# Altium PCB v0-9Bcpu.PcbDoc (part 1 of 2)
Units mil, origin at the board's own origin, x right, y up, seen from the top; angles counter-clockwise.
Board outline 3900 x 3900 mil, 2 copper layers (Top Layer, Bottom Layer); 133 components, 139 nets, 510 pads, 236 vias.
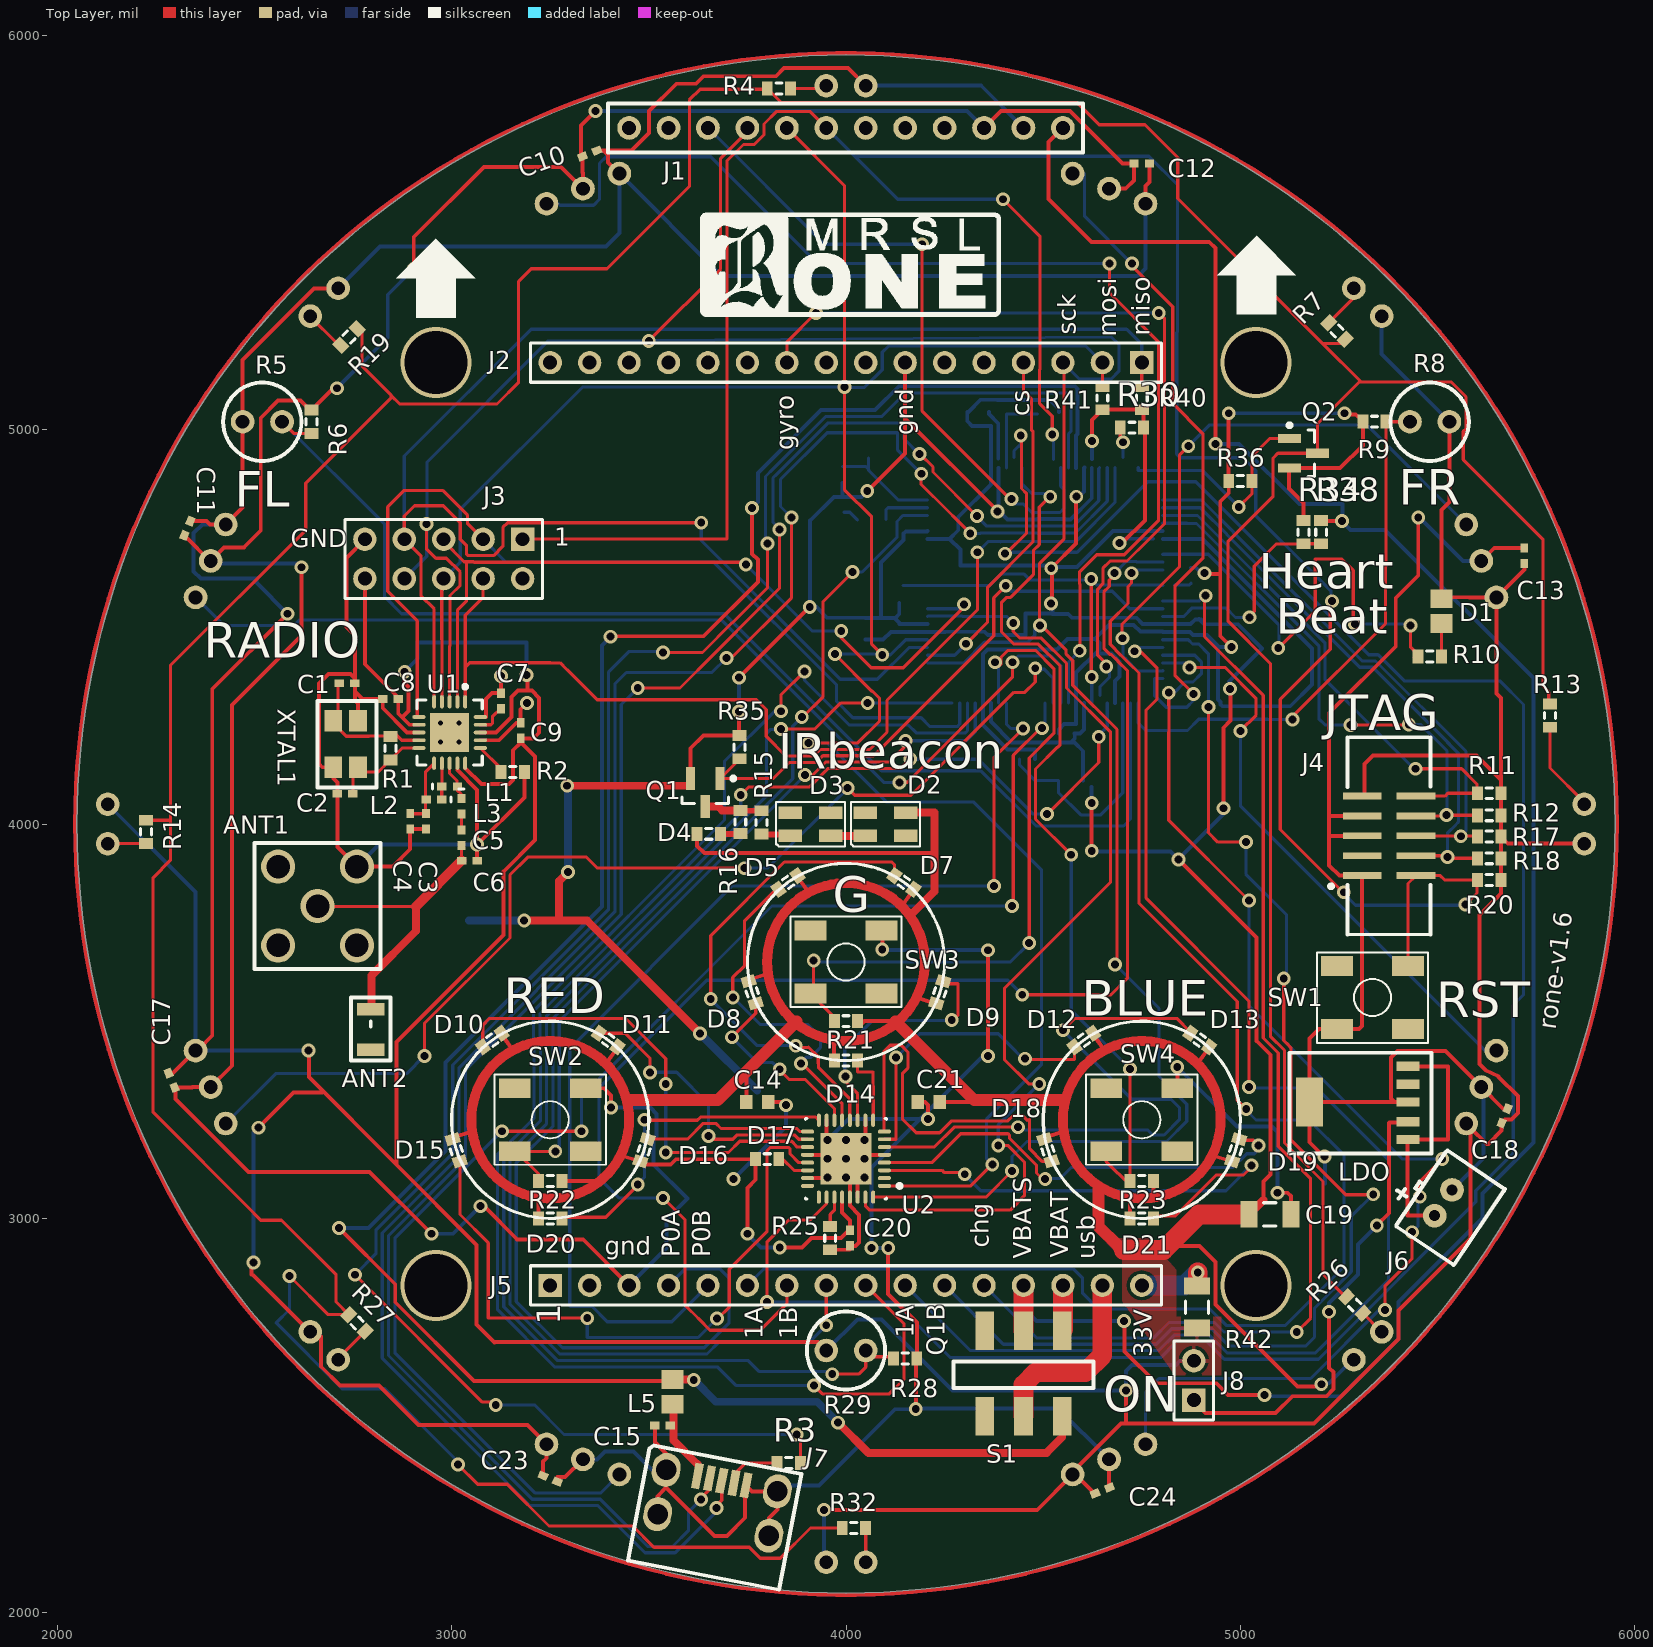
[diagram p0: Top Layer view]
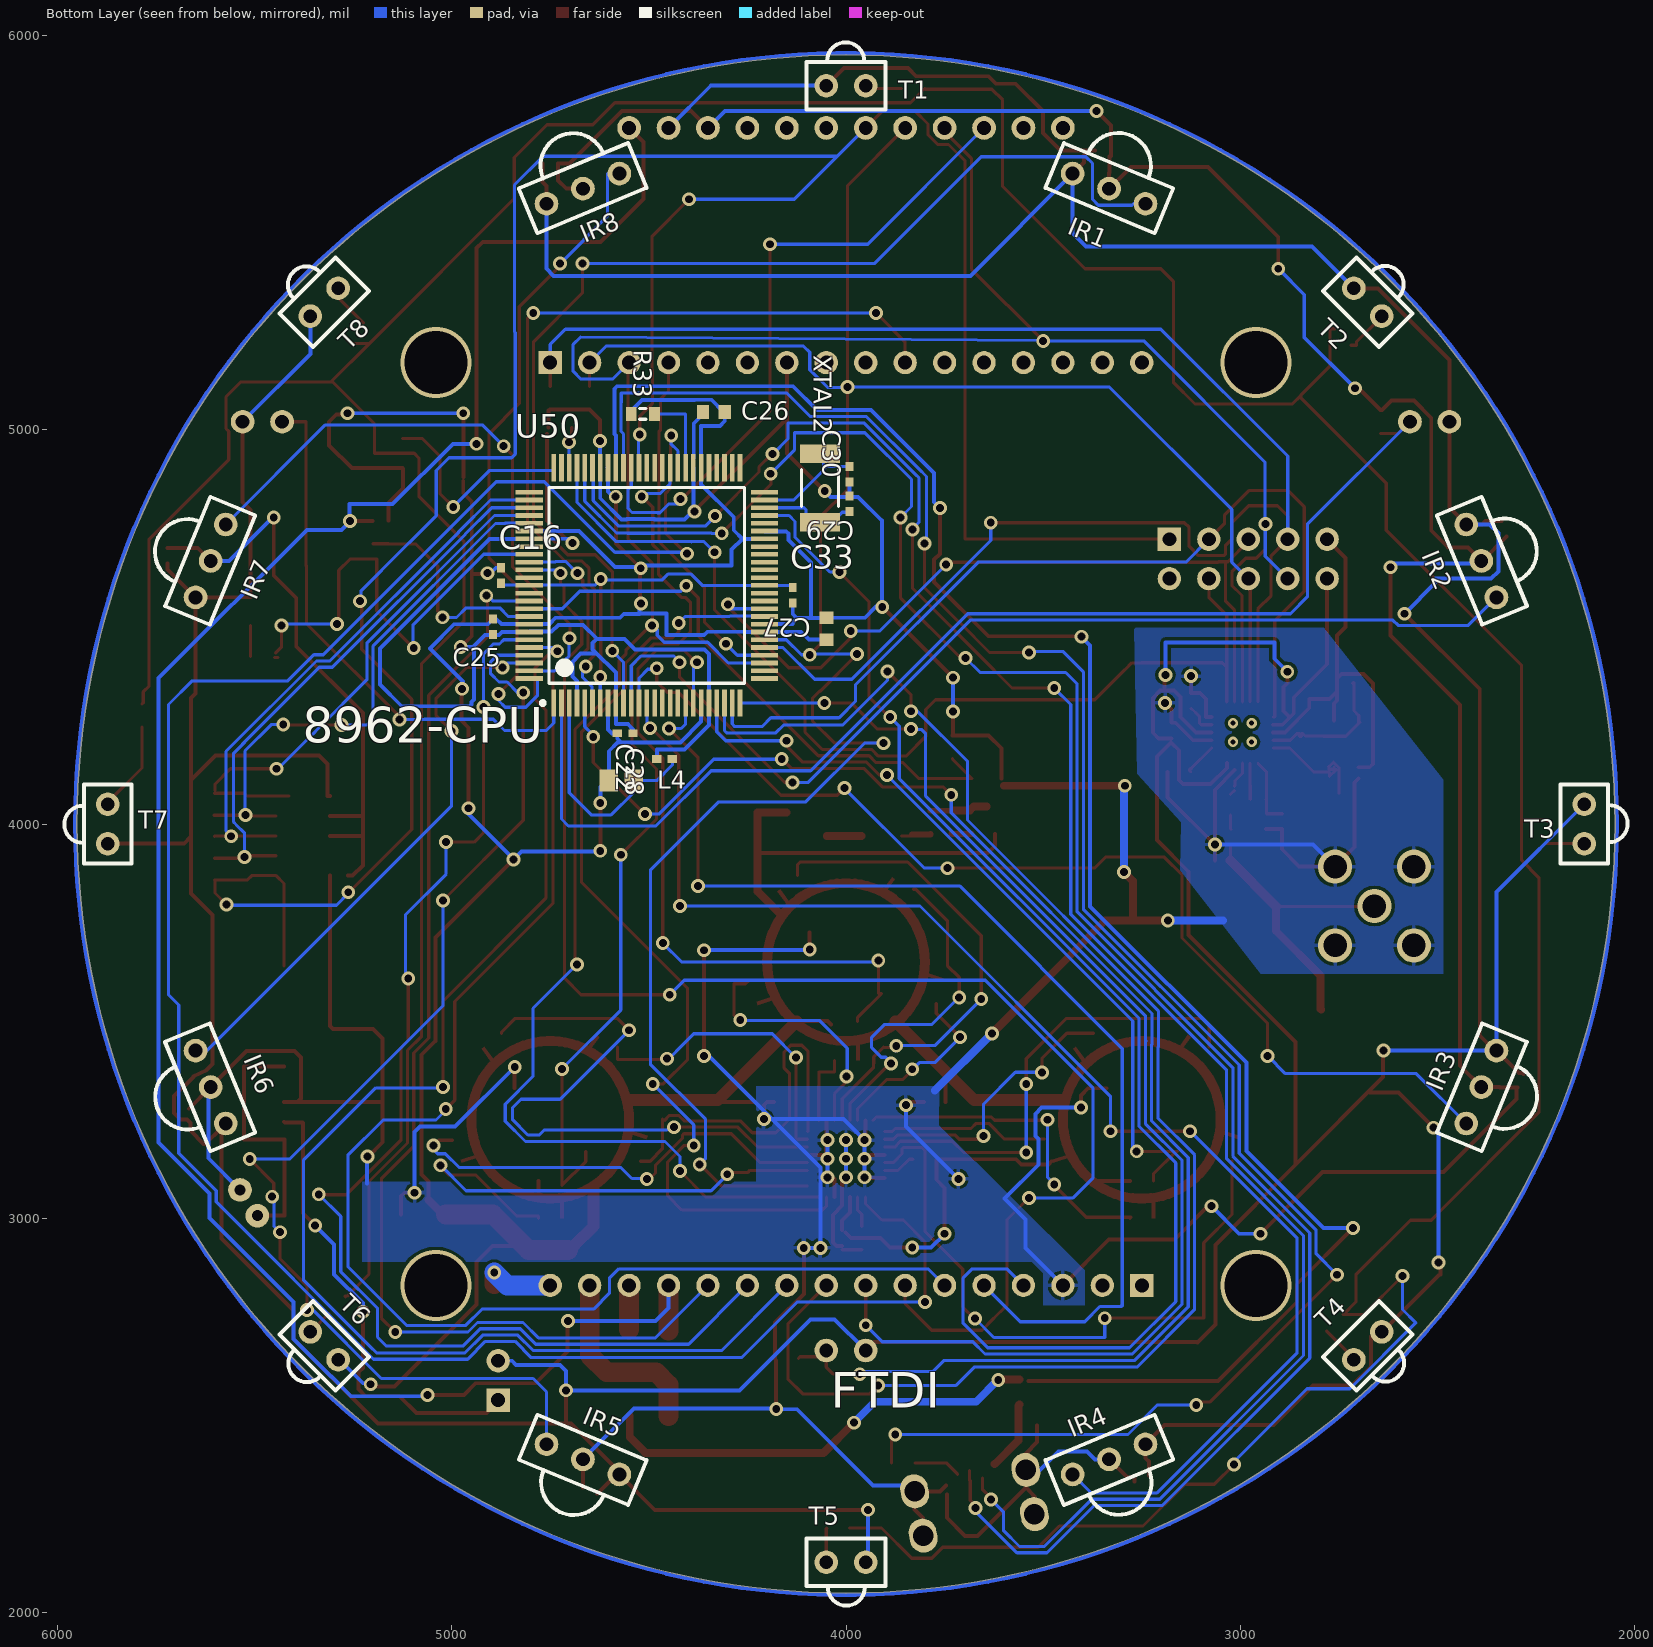
[diagram p1: Bottom Layer view, seen from below]

## Layer stack, top to bottom
Top Layer: signal copper 1.4
Dielectric: dielectric 12.6, FR-4, Dk 4.8
Bottom Layer: signal copper 1.4

## Board outline
4000,2050 cw(c4000,4000) 2050,4000 cw(c4000,4000) 4000,5950 cw(c4000,4000) 5950,4000 cw(c4000,4000)

## Design rules (kind name [scope] priority, off if disabled: settings)
Clearance [All] p1: gap=8
PolygonConnect [All] p1: connectstyle=Relief reliefconductorwidth=10 reliefentries=4 polygonreliefangle="90 Angle"
RoomDefinition USB_Headers [InComponentClass('USB_Headers')] p1: confinementstyle=ConfineIn formatcopy=TRUE lockcomponents=FALSE outline 0,0 2000,0 2000,1000 0,1000
RoomDefinition Radio [InComponentClass('Radio')] p2: confinementstyle=ConfineIn formatcopy=TRUE lockcomponents=FALSE outline 0,0 2000,0 2000,1000 0,1000
RoomDefinition LightSensors_Buttons_LCD [InComponentClass('LightSensors_Buttons_LCD')] p3: confinementstyle=ConfineIn formatcopy=TRUE lockcomponents=FALSE outline 0,0 2000,0 2000,1000 0,1000
RoomDefinition LEDs [InComponentClass('LEDs')] p4: confinementstyle=ConfineIn formatcopy=TRUE lockcomponents=FALSE outline 0,0 2000,0 2000,1000 0,1000
RoomDefinition IRComms [InComponentClass('IRComms')] p5: confinementstyle=ConfineIn formatcopy=TRUE lockcomponents=FALSE outline 0,0 2000,0 2000,1000 0,1000
RoomDefinition CPU [InComponentClass('CPU')] p6: confinementstyle=ConfineIn formatcopy=TRUE lockcomponents=FALSE outline 0,0 2000,0 2000,1000 0,1000
RoutingVias [All] p1: holewidth=20 width=35 viastyle="Through Hole" minholewidth=20 minwidth=35 maxholewidth=20 maxwidth=35
SMDNeckDown [All] p1: percent=400.000
SilkscreenOverComponentPads [All] p1: minsilkscreentomaskgap=10
SolderMaskExpansion [All] p1: expansion=4
Width "Schematic Width Constraint_10" [InNet('5VUSB')] p1: maxlimit=20 minlimit=10 preferedwidth=10 minimp=50.000000 maximp=50.000000 favimp=50.000000
Width "Schematic Width Constraint_9" [InNet('NetC15_2')] p2: maxlimit=20 minlimit=10 preferedwidth=10 minimp=50.000000 maximp=50.000000 favimp=50.000000
Width "Schematic Width Constraint_8" [InNet('GND')] p3: maxlimit=20 minlimit=10 preferedwidth=10 minimp=50.000000 maximp=50.000000 favimp=50.000000
Width "Schematic Width Constraint_2" [InNet('NetJ6_1')] p4: maxlimit=10 minlimit=10 preferedwidth=10
Width "Schematic Width Constraint_1" [InNet('3.3V_LDO')] p5: maxlimit=10 minlimit=10 preferedwidth=10
Width "Schematic Width Constraint_3" [InNet('3.3V_PS')] p6: maxlimit=20 minlimit=10 preferedwidth=10 minimp=50.000000 maximp=50.000000 favimp=50.000000
Width "Schematic Width Constraint_7" [InNet('VBAT_SW')] p7: maxlimit=20 minlimit=10 preferedwidth=10 minimp=50.000000 maximp=50.000000 favimp=50.000000
Width "Schematic Width Constraint_6" [InNet('5VUSB_SW')] p8: maxlimit=20 minlimit=10 preferedwidth=10 minimp=50.000000 maximp=50.000000 favimp=50.000000
Width "Schematic Width Constraint_4" [InNet('VBAT')] p9: maxlimit=20 minlimit=10 preferedwidth=10 minimp=50.000000 maximp=50.000000 favimp=50.000000
Width "Schematic Width Constraint" [InNet('3.3V')] p10: maxlimit=20 minlimit=10 preferedwidth=10 minimp=50.000000 maximp=50.000000 favimp=50.000000
Width [All] p11: maxlimit=8 minlimit=8 preferedwidth=8
27 further rules are at their usual default settings.

## Classes and differential pairs
component class Radio: ANT1 Ant1 ANT2 C1 C2 C3 C4 C5 C6 C7 C8 C9 C? J3 L1 L2 L3 R1 R2 U1 XTAL1
component class LEDs: C14 C20 C21 D5 D7 D8 D9 D10 D11 D12 D13 D14 D15 D16 D17 D18 D19 D20 D21 R25 TP? U2
component class CPU: C16 C22 C25 C26 C27 C28 C29 C30 C33 D1 D? I2C IR_BEACON J4 L4 "LED1 Power" "LED2 USB" "LED-H Blinky" LEDs R10 R11 R12 R17 R18 R20 R30 R33 R40 R41 RST SPI SW1 SW? SW_RED U0 U50 XTAL2 "XTAL 1"
component class IRComms: C10 C11 C12 C13 C17 C18 C23 C24 D2 D3 D4 IR1 IR2 IR3 IR4 IR5 IR6 IR7 IR8 Q1 Q2 R4 R7 R13 R14 R15 R16 R19 R26 R27 R32 R35 R36 T1 T2 T3 T4 T5 T6 T7 T8 U6 U7 U9 U10
component class LightSensors_Buttons_LCD: J1 R5 R6 R8 R9 R21 R22 R23 R28 R29 SW2 SW3 SW4
component class USB_Headers: C15 C19 J2 J5 J6 J7 J8 L5 LDO R3 R34 R38 R42 S1 VDDC

## Components (designator, comment, footprint, x,y, rotation, side; value= is the part's Value field where it differs from the comment)
ANT1 "Ant" AntennaSMA 2660,3792 r0 top
ANT2 "Antenna" antenna 2795,3530 r0 top
C1 "Cap Semi" CAPC1005L 2735,4357 r180 top
C2 "Cap Semi" CAPC1005L 2730,4077 r0 top
C3 "Cap Semi" CAPC1005L 2935,4007 r90 top
C4 "Cap Semi" CAPC1005L 2895,4007 r90 top
C5 "Cap Semi" CAPC1005L 3025,3965 r90 top
C6 "Cap Semi" CAPC1005L 3045,3907 r180 top
C7 "Cap Semi" CAPC1005L 3125,4312 r270 top
C8 "Cap Semi" CAPC1005L 2845,4317 r0 top
C9 "Cap Semi" CAPC1005L 3175,4237 r270 top
C10 "Cap Semi" CAPC1005L 3350,5700 r22.5 top
C11 "Cap Semi" CAPC1005L 2330,4750 r67.5 top
C12 "Cap Semi" CAPC1005L 4750,5675 r0 top
C13 "Cap Semi" CAPC1005L 5720,4680 r270 top
C14 "Cap Semi" CAPC1608L 3775,3295 r180 top
C15 "" CAPC1005L 3535,2475 r0 top
C16 "Cap Semi" CAPC1005L 4875,4630 r270 bottom
C17 "Cap Semi" CAPC1005L 2290,3350 r112.5 top
C18 "Cap Semi" CAPC1005L 5670,3260 r247.5 top
C19 "Cap Pol3" CAPC3216L 5075,3010 r0 top
C20 "Cap Semi" CAPC1005L 4010,2950 r90 top
C21 "Cap Semi" CAPC1608L 4210,3295 r0 top
C22 "Cap Semi" CAPC1005L 4560,4230 r0 bottom
C23 "Cap Semi" CAPC1005L 3250,2340 r157.5 top
C24 "Cap Semi" CAPC1005L 4650,2310 r202.5 top
C25 "Cap Semi" CAPC1005L 4895,4500 r90 bottom
C26 "Cap Semi" CAPC1608L 4335,5045 r180 bottom
C27 "Cap Semi" CAPC1608L 4050,4495 r270 bottom
C28 "Cap Semi" CAPC1005L 4460,4165 r180 bottom
C29 "Cap Semi" CAPC1005L 3991,4812 r270 bottom
C30 "Cap Semi" CAPC1005L 3991,4887 r90 bottom
C33 "Cap Semi" CAPC1005L 4135,4580 r90 bottom
D1 "heartbeat(white)" INDC2012L 5510,4540 r270 top
D2 "IRBeacon" IRBeacon 4100,4000 r270 top
D3 "IRBeacon" IRBeacon 3910,4000 r270 top
D4 "BEACON_PILOT" SurfaceMount(603) 3652,3975 r0 top
D5 "green" SurfaceMount(603) 3853,3852 r216 top
D7 "green" SurfaceMount(603) 4147,3852 r144 top
D8 "green" SurfaceMount(603) 3762,3573 r288 top
D9 "green" SurfaceMount(603) 4238,3573 r72 top
D10 "red" SurfaceMount(603) 3103,3452 r216 top
D11 "red" SurfaceMount(603) 3397,3452 r144 top
D12 "blue" SurfaceMount(603) 4603,3452 r216 top
D13 "blue" SurfaceMount(603) 4897,3452 r144 top
D14 "green" SurfaceMount(603) 4000,3400 r0 top
D15 "red" SurfaceMount(603) 3012,3173 r288 top
D16 "red" SurfaceMount(603) 3488,3173 r72 top
D17 "extra" SurfaceMount(603) 3800,3150 r0 top
D18 "blue" SurfaceMount(603) 4512,3173 r288 top
D19 "blue" SurfaceMount(603) 4988,3173 r72 top
D20 "red" SurfaceMount(603) 3250,3000 r0 top
D21 "blue" SurfaceMount(603) 4750,3000 r0 top
IR1 "GP1UX31QS" GP1UX31QS 3333,5611 r292.5 bottom locked
IR2 "GP1UX31QS" GP1UX31QS 2389,4667 r337.5 bottom locked
IR3 "GP1UX31QS" GP1UX31QS 2389,3333 r22.5 bottom locked
IR4 "GP1UX31QS" GP1UX31QS 3333,2389 r67.5 bottom locked
IR5 "GP1UX31QS" GP1UX31QS 4667,2389 r112.5 bottom locked
IR6 "GP1UX31QS" GP1UX31QS 5611,3333 r157.5 bottom locked
IR7 "GP1UX31QS" GP1UX31QS 5611,4667 r202.5 bottom locked
IR8 "GP1UX31QS" GP1UX31QS 4667,5611 r247.5 bottom locked
J1 "LCD" LCD-6100breakout 3950,5765 r270 top locked
J2 "HCOMM" HDR1X16 4750,5170 r180 top locked
J3 "radio_debug" HDR2X5 3180,4722 r180 top
J4 "JTAG" JTAG-10 5377,3970 r270 top
J5 "HMOT" HDR1X16 3250,2830 r0 top locked
J6 "Bat" BatteryConnJST 5515,3040 r56 top
J7 "USB" "USB Minib (thru-hole)" 3685,2335 r79.1 top
J8 "Header 2" HDR1X2 4882,2539 r90 top
L1 "Inductor" INDC1005AL 2995,4095 r0 top
L2 "Inductor" INDC1005AL 2955,4062 r180 top
L3 "Inductor" INDC1005AL 3025,4045 r270 top
L4 "Inductor" INDC2012L 4570,4110 r180 bottom
L5 "Inductor" INDC2012L 3560,2560 r90 top
LDO "TPS73733" SOT-223-5pin 5425,3295 r90 top
Q1 "Mosfet" SOT-23 3643,4080 r270 top
Q2 "Mosfet" SOT-23 5160,4940 r0 top
R1 "Res3" RESC1608L 2845,4192 r270 top
R2 "Res3" RESC1608L 3155,4132 r180 top
R3 "" RESC1608L 3855,2380 r180 top
R4 "Res3" RESC1608L 3830,5865 r180 top
R5 "photoresistor" photoresistor 2520,5020 r270 top locked
R6 "Res3" RESC1608L 2645,5020 r90 top
R7 "Res3" RESC1608L 5245,5250 r315 top
R8 "photoresistor" photoresistor 5480,5020 r90 top locked
R9 "Res3" RESC1608L 5340,5020 r180 top
R10 "Res3" RESC1608L 5480,4425 r180 top
R11 "Res3" RESC1608L 5631,4078 r0 top
R12 "Res3" RESC1608L 5631.21,4022 r0 top
R13 "Res3" RESC1608L 5785,4275 r90 top
R14 "Res3" RESC1608L 2225,3980 r90 top
R15 "Res3" RESC1608L 3786,4004 r270 top
R16 "Res3" RESC1608L 3732,4005 r270 top
R17 "Res3" RESC1608L 5631,3968 r0 top
R18 "Res3" RESC1608L 5631,3913 r0 top
R19 "Res3" RESC1608L 2740,5235 r45 top
R20 "Res3" RESC1608L 5631,3858 r0 top
R21 "Res3" RESC1608L 4000,3500 r0 top
R22 "Res3" RESC1608L 3250,3095 r0 top
R23 "Res3" RESC1608L 4750,3095 r0 top
R25 "Res3" RESC1608L 3960,2950 r90 top
R26 "Res3" RESC1608L 5290,2780 r135 top
R27 "Res3" RESC1608L 2760,2735 r135 top
R28 "Res3" RESC1608L 4150,2645 r0 top
R29 "photoresistor" photoresistor 4000,2665 r270 top locked
R30 "Res3" RESC1608L 4725,5005 r0 top
R32 "Res3" RESC1608L 4020,2215 r180 top
R33 "Res3" RESC1608L 4515,5040 r180 bottom
R34 "" RESC1608L 5160,4740 r90 top
R35 "Res3" RESC1608L 3730,4195 r270 top
R36 "Res3" RESC1608L 5000,4870 r0 top
R38 "" RESC1608L 5205,4740 r270 top
R40 "Res3" RESC1608L 4750,5080 r90 top
R41 "Res3" RESC1608L 4650,5080 r90 top
R42 "" RESC3216L 4890,2775 r270 top
S1 "Power Switch" DPDTSwitch 4450,2715 r0 top
SW1 "Reset" SwitchTall-TL330 5335,3560 r180 top
SW2 "SW_RED" SwitchTall-TL330 3250,3250 r0 top locked
SW3 "SW_GREEN" SwitchTall-TL330 4000,3650 r0 top locked
SW4 "SW_BLUE" SwitchTall-TL330 4750,3250 r0 top locked
T1 "LN54" LN54 4000,5872 r270 bottom locked
T2 "LN54" LN54 2677,5323 r315 bottom locked
T3 "LN54" LN54 2128,4000 r0 bottom locked
T4 "LN54" LN54 2677,2677 r45 bottom locked
T5 "LN54" LN54 4000,2128 r90 bottom locked
T6 "LN54" LN54 5323,2677 r135 bottom locked
T7 "LN54" LN54 5872,4000 r180 bottom locked
T8 "LN54" LN54 5323,5323 r225 bottom locked
U1 "nRF24L01P" QFN-20 2995,4232 r270 top
U2 "Allegro6285" QFN-32 4000,3151.3 r180 top
U50 "LM3S9B96" LQFP-100 4505,4605 r90 bottom locked
XTAL1 "RADIO CRYSTAL" RadioCrystal 2700,4262 r270 top
XTAL2 "8 MHz" RESC5025L 4066,4852 r90 bottom

## Footprints (in the part's own frame and the unit in brackets; to place one, negate y for a bottom-side part, rotate by r counter-clockwise, add the part's x,y. Pads: shape width x height; smd on the part's side, far side on the other; paste and mask are expansions set on the pad)
antenna [mm] "Radio Antenna"
  rect 1.8x0.8 smd: 1(0,0) 2(0,-2.6)
  silkscreen extent -1.27,-3.3 1.27,0.76
AntennaSMA [mm] "antenna for radios , tyco 108-11200"
  round 2.2 hole 1.511: 1(0,0) 2(-2.54,2.54) 3(2.54,2.54) 4(2.54,-2.54) 5(-2.54,-2.54)
  silkscreen extent -4.06,-4.06 4.06,4.06
BatteryConnJST [mil] "Connector for Battery"
  round 60 hole 28: 1(-40,0) 2(38.74,0)
  silkscreen extent -117,-110 116,115
CAPC1005L [mm] "Chip Capacitor, Body 1.0x0.5mm, IPC High Density"
  rect 0.6x0.5 smd: 1(-0.5,0) 2(0.5,0)
  body extent -0.55,-0.3 0.55,0.3, height 1.3
CAPC1608L [mm] "Chip Capacitor, Body 1.6x0.8mm, IPC High Density"
  rect 0.8x0.9 smd: 1(-0.7,0) 2(0.7,0)
  body extent -0.87,-0.48 0.87,0.48, height 1.3
CAPC3216L [mm] "Chip Capacitor, Body 3.2x1.6mm, IPC High Density"
  rect 1.1x1.7 smd: 1(-1.35,0) 2(1.35,0)
  silkscreen extent -0.4,-0.75 0.4,0.75, body extent -1.7,-0.9 1.7,0.9, height 1.3
DPDTSwitch [mm] "surface mount DPDT switch"
  rect 1.2x2.5 smd: 1(-2.5,-5.5) 2(0,-5.5) 3(2.5,-5.5) 4(-2.5,0) 5(0,0) 6(2.5,0)
  silkscreen extent -4.5,-3.68 4.5,-1.98
GP1UX31QS [mil]
  round 60 hole 35: 1(0,100) 2(0,0) 3(0,-100)
  silkscreen extent -146,-150 60,150
HDR1X2 [mm] "Connector; Header; 2 Position"
  rect 1.5x1.5 hole 0.9: 1(0,0)
  round 1.5 hole 0.9: 2(2.54,0)
  silkscreen extent -1.27,-1.27 3.81,1.27
HDR1X16 [mm] "Connector; Header; 16 Position"
  rect 1.5x1.5 hole 0.9: 1(0,0)
  round 1.5 hole 0.9: 2(2.54,0) 3(5.08,0) 4(7.62,0) 5(10.16,0) 6(12.7,0) 7(15.24,0) 8(17.78,0) 9(20.32,0) 10(22.86,0) 11(25.4,0) 12(27.94,0) 13(30.48,0) 14(33.02,0) 15(35.56,0) 16(38.1,0)
  silkscreen extent -1.27,-1.27 39.37,1.27
HDR2X5 [mm] "Connector; Header; 5x2 Position"
  rect 1.5x1.5 hole 0.9: 1(0,0)
  round 1.5 hole 0.9: 2(0,2.54) 3(2.54,0) 4(2.54,2.54) 5(5.08,0) 6(5.08,2.54) 7(7.62,0) 8(7.62,2.54) 9(10.16,0) 10(10.16,2.54)
  silkscreen extent -1.27,-1.27 11.43,3.81
INDC1005AL [mm] "Chip Inductor, Body 1.0x0.5mm, IPC High Density"
  rect 0.6x0.5 smd: 1(-0.5,0) 2(0.5,0)
  silkscreen extent -1.1,-0.15 -1.1,0.15, body extent -0.55,-0.3 0.55,0.3, height 0.55
INDC2012L [mm] "Chip Inductor, Body 2.0x1.2mm, IPC High Density"
  rect 1.2x1.4 smd: 1(-0.8,0) 2(0.8,0)
  body extent -1.1,-0.7 1.1,0.7, height 0.55
IRBeacon [mm]
  rect 0.8x1.5 smd: 1(-0.738,1.3) 2(0.762,1.3) 3(-0.738,-1.3) 4(0.762,-1.3)
  silkscreen extent -1.42,-2.21 1.46,2.24
JTAG-10 [mm] "Connector, Socket Strip, Double Row, SMT, 20 Position, Vertical, Pitch 2mm, Body 20 x 4 mm (LxW)"
  rect 0.44x2.5 smd: 1(-2.56,-1.73) 2(-2.56,1.73) 3(-1.28,-1.73) 4(-1.28,1.73) 5(0,-1.73) 6(0,1.73) 7(1.28,-1.73) 8(1.28,1.73) 9(2.56,-1.73) 10(2.56,1.73)
  silkscreen extent -6.35,-3.86 6.35,2.67, body extent -6.35,-2.01 6.35,2.03, height 3.56
LCD-6100breakout [mil]
  round 60 hole 35: 1(0,-500) 2(0,-400) 3(0,-300) 4(0,-200) 5(0,-100) 6(0,0) 7(0,100) 8(0,200) 9(0,300) 10(0,400) 11(0,500) 12(0,600)
  silkscreen extent -62,-553 62,651
LN54 [mil]
  round 60 hole 35: 1(0,50) 2(0,-50)
  silkscreen extent -110,-100 60,100
LQFP-100 [mm] "100-Pin LQFP Package"
  rect 1.75x0.3 smd: 1(-7.575,6) 2(-7.575,5.5) 3(-7.575,5) 4(-7.575,4.5) 5(-7.575,4) 6(-7.575,3.5) 7(-7.575,3) 8(-7.575,2.5) 9(-7.575,2) 10(-7.575,1.5) 11(-7.575,1) 12(-7.575,0.5) 13(-7.575,0) 14(-7.575,-0.5) 15(-7.575,-1) 16(-7.575,-1.5) 17(-7.575,-2) 18(-7.575,-2.5) 19(-7.575,-3) 20(-7.575,-3.5) 21(-7.575,-4) 22(-7.575,-4.5) 23(-7.575,-5) 24(-7.575,-5.5) 25(-7.575,-6) 51(7.575,-6) 52(7.575,-5.5) 53(7.575,-5) 54(7.575,-4.5) 55(7.575,-4) 56(7.575,-3.5) 57(7.575,-3) 58(7.575,-2.5) 59(7.575,-2) 60(7.575,-1.5) 61(7.575,-1) 62(7.575,-0.5) 63(7.575,0) 64(7.575,0.5) 65(7.575,1) 66(7.575,1.5) 67(7.575,2) 68(7.575,2.5) 69(7.575,3) 70(7.575,3.5) 71(7.575,4) 72(7.575,4.5) 73(7.575,5) 74(7.575,5.5) 75(7.575,6)
  rect 0.3x1.75 smd: 26(-6,-7.575) 27(-5.5,-7.575) 28(-5,-7.575) 29(-4.5,-7.575) 30(-4,-7.575) 31(-3.5,-7.575) 32(-3,-7.575) 33(-2.5,-7.575) 34(-2,-7.575) 35(-1.5,-7.575) 36(-1,-7.575) 37(-0.5,-7.575) 38(0,-7.575) 39(0.5,-7.575) 40(1,-7.575) 41(1.5,-7.575) 42(2,-7.575) 43(2.5,-7.575) 44(3,-7.575) 45(3.5,-7.575) 46(4,-7.575) 47(4.5,-7.575) 48(5,-7.575) 49(5.5,-7.575) 50(6,-7.575) 76(6,7.575) 77(5.5,7.575) 78(5,7.575) 79(4.5,7.575) 80(4,7.575) 81(3.5,7.575) 82(3,7.575) 83(2.5,7.575) 84(2,7.575) 85(1.5,7.575) 86(1,7.575) 87(0.5,7.575) 88(0,7.575) 89(-0.5,7.575) 90(-1,7.575) 91(-1.5,7.575) 92(-2,7.575) 93(-2.5,7.575) 94(-3,7.575) 95(-3.5,7.575) 96(-4,7.575) 97(-4.5,7.575) 98(-5,7.575) 99(-5.5,7.575) 100(-6,7.575)
  silkscreen extent -7.7,-6.3 6.3,6.83, body extent -7,-7 7,7, height 1.6
photoresistor [mil]
  round 60 hole 35: 1(0,50) 2(0,-50)
  silkscreen extent -99,-99 99,99
QFN-20 [mm] "QFN, 20-Leads, Body 4.2x4.2mm (max), Pitch 0.50mm, IPC Medium Density"
  oval 0.85x0.25 smd: 1(-1.975,1) 2(-1.975,0.5) 3(-1.975,0) 4(-1.975,-0.5) 5(-1.975,-1) 11(1.975,-1) 12(1.975,-0.5) 13(1.975,0) 14(1.975,0.5) 15(1.975,1)
  oval 0.25x0.85 smd: 6(-1,-1.975) 7(-0.5,-1.975) 8(0,-1.975) 9(0.5,-1.975) 10(1,-1.975) 16(1,1.975) 17(0.5,1.975) 18(0,1.975) 19(-0.5,1.975) 20(-1,1.975)
  rect 2.5x2.5 smd: 21(0,0)
  silkscreen extent -3.07,-2.1 2.1,2.1, body extent -2.07,-2.07 2.07,2.07, height 0.8
QFN-32 [mm] "QFN, 32-Leads, Body 5.2x5.2mm (max), Pitch 0.50mm, IPC Medium Density"
  oval 0.85x0.25 smd: 1(-2.475,1.75) 2(-2.475,1.25) 3(-2.475,0.75) 4(-2.475,0.25) 5(-2.475,-0.25) 6(-2.475,-0.75) 7(-2.475,-1.25) 8(-2.475,-1.75) 17(2.475,-1.75) 18(2.475,-1.25) 19(2.475,-0.75) 20(2.475,-0.25) 21(2.475,0.25) 22(2.475,0.75) 23(2.475,1.25) 24(2.475,1.75)
  oval 0.25x0.85 smd: 9(-1.75,-2.475) 10(-1.25,-2.475) 11(-0.75,-2.475) 12(-0.25,-2.475) 13(0.25,-2.475) 14(0.75,-2.475) 15(1.25,-2.475) 16(1.75,-2.475) 25(1.75,2.475) 26(1.25,2.475) 27(0.75,2.475) 28(0.25,2.475) 29(-0.25,2.475) 30(-0.75,2.475) 31(-1.25,2.475) 32(-1.75,2.475)
  rect 3.3x3.3 smd: 33(0,0)
  silkscreen extent -3.57,-2.6 2.6,2.6, body extent -2.57,-2.58 2.58,2.57, height 1
RadioCrystal [mm] "Crystal for radio"
  rect 1.4x1.15 smd: 1(0,0) 2(3,0) 3(3,1.6) 4(0,1.6)
  silkscreen extent -1.27,-1.02 4.32,2.79
RESC1608L [mm] "Chip Resistor, Body 1.6x0.8mm, IPC High Density"
  rect 0.7x0.9 smd: 1(-0.75,0) 2(0.75,0)
  silkscreen extent -0.2,-0.35 0.2,0.35, body extent -0.85,-0.48 0.85,0.48, height 0.9
RESC3216L [mm] "Chip Resistor, Body 3.1x1.6mm, IPC High Density"
  rect 1.1x1.7 smd: 1(-1.35,0) 2(1.35,0)
  silkscreen extent -0.4,-0.75 0.4,0.75, body extent -1.68,-0.87 1.68,0.87, height 2.54
RESC5025L [mm] "Chip Resistor, Body 5.0x2.5mm, IPC High Density"
  rect 1.2x2.6 smd: 1(-2.2,0) 2(2.2,0)
  silkscreen extent -1.2,-1.2 1.2,1.2, body extent -2.58,-1.33 2.58,1.33, height 0.9
SOT-23 [mm] "SOT23, 3-Leads, Body 3.0x2.5mm (max), Pitch 0.95mm, IPC Medium Density"
  rect 1.5x0.6 smd: 1(-0.9,0.95) 2(-0.9,-0.95) 3(0.9,0)
  silkscreen extent -1.02,-1.5 0.7,1.93, body extent -0.7,-1.5 0.7,1.5, height 1.2
SOT-223-5pin [mm] "sot223 tps73733"
  rect 0.6x1.5 smd: 1(-2.413,0) 2(-1.27,0) 3(0,0) 4(1.143,0) 5(2.3,0)
  rect 3.15x1.75 smd: 6(0,6.35)
  silkscreen extent -3.3,-1.52 3.17,7.65
SurfaceMount(603) [mm]
  rect 0.7x0.9 smd: 1(-0.75,0) 2(0.75,0)
  silkscreen extent -0.2,-0.35 0.2,0.35, body extent -0.85,-0.48 0.85,0.48, height 0.9
SwitchTall-TL330 [mil] "Small SMDTall Tact Switch E-Switch TL330"
  rect 80x50 smd: 1(-90,80) 2(90,80) 3(-90,-80) 4(90,-80)
  silkscreen extent -141,-114 141,115
"USB Minib (thru-hole)" [mm]
  rect 1.65x0.55 smd: 1(0,1.6) 2(0,0.8) 3(0,0) 4(0,-0.8) 5(0,-1.6)
  oval 2.2x1.8 hole 1.321: 6(0,3.65) 7(-2.9,3.65) 8(-2.9,-3.65) 9(0,-3.65)
  silkscreen extent -6.2,-4.95 1.39,4.95

## Part data
ANT1: library part AntennaConn
C1 C2 C3 C4 C5 C6 C7 C8 C9 C10 C11 C12 C13 C14 C16 C17 C18 C20 C21 C22 C23 C24 C25 C26 C27 C28 C29 C30 C33: "Capacitor (Semiconductor SIM Model)"
C15: library part Cap, "Capacitor"
C19: "Polarized Capacitor (Surface Mount)"
D1: library part LED2, "Typical RED, GREEN, YELLOW, AMBER GaAs LED"
D4 D5 D7 D8 D9 D10 D11 D12 D13 D14 D15 D16 D17 D18 D19 D20 D21: library part LED
J1: library part LCD-NokiaBreakout
J2 J5: library part "Header 16", "Header, 16-Pin"
J3: library part "Header 5X2", "Header, 5-Pin, Dual row"
J4: library part "Header 5X2H", "Header, 5-Pin, Dual row, Right Angle"
J6: library part BatteryConnJST
J7: library part USB-ConnTH
J8: "Header, 2-Pin"
LDO: library part LDO33-TI-TPS73733
R1 R2 R4 R6 R7 R9 R10 R11 R12 R13 R14 R15 R16 R17 R18 R19 R20 R21 R22 R23 R25 R26 R27 R28 R30 R32 R33 R35 R36 R40 R41: "Resistor"
R3 R34 R38 R42: library part Res1, "Resistor"
S1: library part DPDTSwitch
SW1 SW2 SW3 SW4: library part Switch-TL330
U1: library part radio-nRF24L01P
XTAL1: library part RadioCrystal
XTAL2: library part XTAL, "Crystal Oscillator"

## Via types
v1: diameter 35, hole 20, Top Layer to Bottom Layer, 228 vias
v2: diameter 25.98, hole 12.99, Top Layer to Bottom Layer, tented top, 4 vias
v3: diameter 180, hole 160, Top Layer to Bottom Layer, 4 vias

## Nets (pads, with @x,y where several pads share a name; then routed paths per layer and width w, separated by ;. In a path a pad name is that pad's centre, name@x,y a point inside that pad or via, vN(x,y) a via of type N, cw(c..) or ccw(c..) an arc to the next point about the centre after c; other vN are vias at no path point)
3.3V: C8.2 C9.2 C10.2 C11.2 C12.2 C13.2 C14.2 C17.2 C18.2 C19.1 C20.2 C21.2 C22.2 C23.2 C24.2 C25.2 C26.2 C27.2 D1.1 D2.1 D4.1 D5.1 D7.1 D8.1 D9.1 D10.1 D11.1 D12.1 D13.1 D14.1 D15.1 D16.1 D17.1 D18.1 D19.1 D20.1 D21.1 IR1.3 IR2.3 IR3.3 IR4.3 IR5.3 IR6.3 IR7.3 IR8.3 J1.11 J3.10 J4.1 J8.2 L4.1 R5.2 R8.2 R11.2 R12.2 R17.2 R18.2 R20.2 R21.2 R22.2 R23.2 R29.2 R33.1 R42.2 T1.2 T2.2 T3.2 T4.2 T5.2 T6.2 T7.2 T8.2 U1.7 U1.15 U1.18 U2.28 U50.8 U50.20 U50.32 U50.44 U50.56 U50.68 U50.81 U50.93 | length 108866.2
  Top Layer w10: C17.2@2282.47,3366.37 C17.2@2282.47,3368.19 2293.53,3368.19 IR3.3@2350.73,3425.39 ; C11.2@2337.53,4768.19 2378,4768.19 2386.8,4759.39 IR2.3@2427.27,4759.39 2470,4802.12 R5.2@2470,5020 2470,5176.81 2651.54,5358.36 T2.2@2712.36,5358.36 ; IR3.3@2359,3430 2393,3464 2393,4342 v1(2584,4533) ; 2493,2858 2493,2883 v1(2498,2888) ; 2498,2855 2640.64,2712.36 T4.2@2641.64,2712.36 ; v1(2510,3230) 2599,3319 2671,3319 ; T4.2@2631,2709 2641.64,2709 2661,2709 2669.36,2700.64 2669.36,2623.83 2717.19,2576 2816,2576 2916,2476 3192,2476 3240.61,2427.39 IR4.3@3240.61,2427.27 3240.61,2391.8 3231.81,2383 C23.2@3231.81,2347.53 ; v1(2637,3426) 2638,3425 2638,3358 2860,3136 ; J3.10@2780,4622 2780,4405 2864.69,4320.31 C8.2@2864.69,4317 2864.69,4279.77 2892.77,4251.69 U1.7@2917.24,4251.69 ; 2876,4271 2891,4286 2891,4347 2881,4357 v1(2881,4386) ; U1.15@3034.37,4154.24 3034.37,4142 3075.37,4101 3145,4101 3156,4112 3156,4187 3175.5,4206.5 3211.31,4170.69 3211.31,3959.31 3131,3879 3131,3718.04 2860,3447.04 2860,3136 ; U1.18@3072.76,4232 3113.08,4232 3152,4270.92 3152,4322 3168,4338 3192,4338 ; 3109,2685 3108,2686 ; C9.2@3175,4217.31 3208,4217.31 3222,4231.31 3222,4320 3204,4338 3192,4338 ; v1@3192,4379 3192,4378 3192,4338 ; 3220,3050 3220.47,3049.53 ; R22.2@3279.53,3095 3367.08,3095 ; C10.2@3368.19,5707.53 3385.47,5707.53 ; IR1.3@3425.39,5649.27 3397,5677.66 3397,5696 3385.47,5707.53 ; D16.1@3478.88,3144.92 3486.79,3137 3520,3137 3520.5,3136.5 3555.63,3136.5 3569.13,3150 D17.1@3770.47,3150 ; D4.1@3622.47,3975 3622.47,3944.53 3641,3926 4224,3926 ; C14.2@3747.44,3295 3747.44,3367.56 ; v1(3750,2961) 3750,3077 3771,3098 D17.1@3771,3150 ; v1(3832,2926) 3888,2926 3912,2950 3987,2950 C20.2@4001,2964 ; v1(3944,2261) 4484.88,2261 IR5.3@4574,2350.12 ; R29.2@3950,2665 3929,2686 3108,2686 ; U2.28@3990.16,3053.86 3990.16,3015.16 ; C20.2@4010,2970 4010,2995 4000,3005 ; R21.2@4038,3491.53 4046.47,3500 4125,3500 ; T1.2@4050,5872 4005,5917 3843,5917 3822,5896 3639,5896 3620,5877 3570,5877 3501,5808 3501,5752.53 3456,5707.53 3385.47,5707.53 ; C21.2@4237.56,3295 4477.87,3295 ; v1(4520,4559) 4522,4561 4522,4647 v1(4520.5,4648.5) 4583,4711 v1@4583,4830 ; IR5.3@4574,2350 IR5.3@4574,2350.12 ; IR5.3@4574,2350.73 IR5.3@4574,2350.12 ; IR5.3@4574.61,2350.73 IR5.3@4574,2350.12 ; v1(4623,3932) v1(4623,4053) ; C24.2@4631.81,2302.47 4630.53,2302.47 4578.44,2354.56 4575.58,2357.42 4574.61,2357.42 4697.19,2480 5186.81,2480 5401.36,2694.54 5401.36,2766.36 5584,2949 IR6.3@5584,3229.34 ; 4710,2481 v1(4710,2564) ; IR8.3@4759.39,5572.73 4759.39,5618 4769.69,5628.3 C12.2@4769.69,5675 ; 4779.53,3054 R23.2@4779.53,3095 ; 4815,2930 4896,2930 4937,2889 4937,2782 5145,2574 5199.72,2574 v1(5205.22,2579.5) ; v1(4843,3910) 5041,3712 5041,3450.33 5076.5,3414.83 5076.5,3111.2 5058.5,3093.2 5058.5,3047.5 ; v1(4957,4040) 4957,4244 4975,4262 v1@4975,4341.28 ; J4.1@5308.89,4070.79 5315,4070.79 5315,4152 5336.5,4173.5 5598.66,4173.5 5660.53,4111.63 ; R8.2@5530,5020 5530,4816 5510,4796 5510,4575 5580.73,4575 5581.12,4574.61 IR7.3@5649.27,4574.61 ; IR6.3@5572.73,3240.61 IR6.3@5584,3229.34 ; IR6.3@5584,3234 IR6.3@5584,3229.34 ; 5654,3360 5622,3376 5606,3392 5606,3769.28 5660.53,3823.81 R20.2@5660.53,3858 R18.2@5660.53,3913 R17.2@5660.53,3968 ; 5655,3359 5704.15,3309.85 5704.15,3267.16 5687.49,3250.51 5671.16,3250.51 C18.2@5662.47,3241.81 5662.47,3222.47 5628.69,3188.69 5624.66,3188.69 IR6.3@5584,3229.34 ; C13.2@5720,4660.31 5720,4645.34 IR7.3@5649.27,4574.61 ; T7.2@5872,3950 5678.53,3950 R17.2@5660.53,3968 ; 2860,3136 3063,2933 3063,2731 3108,2686 ; 3990.16,3015.16 4000,3005.32 4000,3005 ; 3990.16,3015.16 3990,3015 4000,3005 ; IR7.3@5649.27,4574.61 5649.27,4331.26 5660.53,4320 5660.53,4111.63 ; R17.2@5660.53,3968 5660.53,3994 5660.74,3994.21 R12.2@5660.74,4022 5660.74,4049 5660.53,4049.21 R11.2@5660.53,4078 5660.53,4111.63
  Top Layer w20: D2.1@4151.18,4029.06 4224,4029.06 4224,3926 ; 4166.33,3771 4224,3828.67 4224,3920 ; C19.1@5021.85,3010 5058.5,3046.65
  Top Layer w25: 3050,3250 cw(c3250,3250) 3450,3250 ; 3050,3250 cw(c3250,3250) 3450,3250 ; 3050,3250 cw(c3250,3250) 3450,3250 ; 3050,3250 cw(c3250,3250) 3450,3250 ; 3050,3250 cw(c3250,3250) 3450,3250 ; 3050,3250 cw(c3250,3250) 3450,3250 ; 3050,3250 cw(c3250,3250) 3450,3250 ; 3050,3250 cw(c3250,3250) 3450,3250 ; 3050,3250 cw(c3250,3250) 3450,3250 ; 3050,3250 cw(c3250,3250) 3450,3250 ; 3050,3250 ccw(c3250,3250) 3450,3250 ; 3050,3250 ccw(c3250,3250) 3450,3250 ; 3050,3250 ccw(c3250,3250) 3450,3250 ; 3050,3250 ccw(c3250,3250) 3450,3250 ; 3050,3250 ccw(c3250,3250) 3450,3250 ; 3050,3250 ccw(c3250,3250) 3450,3250 ; 3050,3250 ccw(c3250,3250) 3450,3250 ; 3050,3250 ccw(c3250,3250) 3450,3250 ; 3450,3250 ccw(c3250,3250) 3450,3250 ; 3450,3250 ccw(c3250,3250) 3450,3250 ; 3800,3650 cw(c4000,3650) 4200,3650 ; 3800,3650 cw(c4000,3650) 4200,3650 ; 3800,3650 cw(c4000,3650) 4200,3650 ; 3800,3650 cw(c4000,3650) 4200,3650 ; 3800,3650 cw(c4000,3650) 4200,3650 ; 3800,3650 cw(c4000,3650) 4200,3650 ; 3800,3650 cw(c4000,3650) 4200,3650 ; 3800,3650 cw(c4000,3650) 4200,3650 ; 3800,3650 cw(c4000,3650) 4200,3650 ; 3800,3650 cw(c4000,3650) 4200,3650 ; 3800,3650 cw(c4000,3650) 4200,3650 ; 3800,3650 cw(c4000,3650) 4200,3650 ; 3800,3650 ccw(c4000,3650) 4200,3650 ; 3800,3650 ccw(c4000,3650) 4200,3650 ; 3800,3650 ccw(c4000,3650) 4200,3650 ; 3800,3650 ccw(c4000,3650) 4200,3650 ; 3800,3650 ccw(c4000,3650) 4200,3650 ; 3800,3650 ccw(c4000,3650) 4200,3650 ; 3800,3650 ccw(c4000,3650) 4200,3650 ; 3800,3650 ccw(c4000,3650) 4200,3650 ; 3800,3650 ccw(c4000,3650) 4200,3650 ; 3800,3650 ccw(c4000,3650) 4200,3650 ; 3800,3650 ccw(c4000,3650) 4200,3650 ; 3800,3650 ccw(c4000,3650) 4200,3650 ; 3800,3650 ccw(c4000,3650) 4200,3650 ; 3800,3650 ccw(c4000,3650) 4200,3650 ; 3800,3650 ccw(c4000,3650) 4200,3650 ; 3800,3650 ccw(c4000,3650) 4200,3650 ; 3800,3650 ccw(c4000,3650) 4200,3650 ; 3800,3650 ccw(c4000,3650) 4200,3650 ; 3800,3650 ccw(c4000,3650) 4200,3650 ; 3800,3650 ccw(c4000,3650) 4200,3650 ; 3800,3650 ccw(c4000,3650) 4200,3650 ; 3800,3650 ccw(c4000,3650) 4200,3650 ; 3800,3650 ccw(c4000,3650) 4200,3650 ; 3800,3650 ccw(c4000,3650) 4200,3650 ; 3800,3650 ccw(c4000,3650) 4200,3650 ; 3800,3650 ccw(c4000,3650) 4200,3650 ; 3800,3650 ccw(c4000,3650) 4200,3650 ; 3800,3650 ccw(c4000,3650) 4200,3650 ; 3800,3650 ccw(c4000,3650) 4200,3650 ; 3800,3650 ccw(c4000,3650) 4200,3650 ; 3800,3650 ccw(c4000,3650) 4200,3650 ; 3800,3650 ccw(c4000,3650) 4200,3650 ; 3800,3650 ccw(c4000,3650) 4200,3650 ; 3800,3650 ccw(c4000,3650) 4200,3650 ; 3800,3650 ccw(c4000,3650) 4200,3650 ; 3800,3650 ccw(c4000,3650) 4200,3650 ; 3800,3650 ccw(c4000,3650) 4200,3650 ; 3800,3650 ccw(c4000,3650) 4200,3650 ; 3800,3650 ccw(c4000,3650) 4200,3650 ; 3800,3650 ccw(c4000,3650) 4200,3650 ; 3800,3650 ccw(c4000,3650) 4200,3650 ; 3800,3650 ccw(c4000,3650) 4200,3650 ; 3800,3650 ccw(c4000,3650) 4200,3650 ; 3800,3650 ccw(c4000,3650) 4200,3650 ; 3800,3650 ccw(c4000,3650) 4200,3650 ; 3800,3650 ccw(c4000,3650) 4200,3650 ; 3800,3650 ccw(c4000,3650) 4200,3650 ; 3800,3650 ccw(c4000,3650) 4200,3650 ; 3800,3650 ccw(c4000,3650) 4200,3650 ; 3800,3650 ccw(c4000,3650) 4200,3650 ; 3800,3650 ccw(c4000,3650) 4200,3650 ; 3800,3650 ccw(c4000,3650) 4200,3650 ; 3800,3650 ccw(c4000,3650) 4200,3650 ; 3800,3650 ccw(c4000,3650) 4200,3650 ; 3800,3650 ccw(c4000,3650) 4200,3650 ; 3800,3650 ccw(c4000,3650) 4200,3650 ; 3800,3650 ccw(c4000,3650) 4200,3650 ; 3800,3650 ccw(c4000,3650) 4200,3650 ; 3800,3650 ccw(c4000,3650) 4200,3650 ; 3800,3650 ccw(c4000,3650) 4200,3650 ; 3800,3650 ccw(c4000,3650) 4200,3650 ; 3800,3650 ccw(c4000,3650) 4200,3650 ; 3800,3650 ccw(c4000,3650) 4200,3650 ; 3800,3650 ccw(c4000,3650) 4200,3650 ; 3800,3650 ccw(c4000,3650) 4200,3650 ; 3800,3650 ccw(c4000,3650) 4200,3650 ; 3800,3650 ccw(c4000,3650) 4200,3650 ; 3800,3650 ccw(c4000,3650) 4200,3650 ; 4200,3650 ccw(c4000,3650) 4200,3650 ; 4200,3650 ccw(c4000,3650) 4200,3650 ; 4200,3650 ccw(c4000,3650) 4200,3650 ; 4200,3650 ccw(c4000,3650) 4200,3650 ; 4550,3250 ccw(c4750,3250) 4950,3250 ; 4550,3250 ccw(c4750,3250) 4950,3250 ; 4550,3250 ccw(c4750,3250) 4950,3250 ; 4550,3250 ccw(c4750,3250) 4950,3250 ; 4550,3250 cw(c4750,3250) 4950,3250 ; 4550,3250 cw(c4750,3250) 4950,3250 ; 4550,3250 cw(c4750,3250) 4950,3250 ; 4550,3250 cw(c4750,3250) 4950,3250 ; 4550,3250 cw(c4750,3250) 4950,3250 ; 4550,3250 cw(c4750,3250) 4950,3250 ; 4950,3250 ccw(c4750,3250) 4950,3250 ; 4950,3250 ccw(c4750,3250) 4950,3250
  Top Layer w30: 3450,3300 3675,3300 3875,3500 ; 4125,3500 4325,3300 4550,3300 ; 4640,3075 4640,2980 4690,2930
  Top Layer w50: 4705,2920 4805,2920 4895,3010 C19.1@5015.2,3010
  Bottom Layer w10: T3.2@2128,4050 2350.73,3827.27 IR3.3@2350.73,3425.39 ; IR3.3@2352,3426 v1(2637,3426) ; IR2.3@2427.27,4759.39 2368,4759.39 2346,4737.39 2346,4640 2364,4622 2505,4622 2505,4612 v1(2584,4533) ; v1(2498,2888) 2498,3218 v1(2510,3230) ; T2.2@2712.36,5358.36 2818.78,5464.78 3392,5464.78 3425.39,5498.16 IR1.3@3425.39,5649.27 3684.66,5390 4741.39,5390 4759.39,5408 IR8.3@4759.39,5572.73 ; v1(2881,4386) 2914,4419 2914,4460 3190,4460 v1(3190,4378) v1@3190,4377 ; v1(3750,2961) 3749,2961 3749.5,2960.5 3784,2926 v1(3832,2926) ; T5.2@3944,2130 v1(3944,2261) ; R29.2@3952,2667 4029,2744 4090,2744 4270,2564 v1(4710,2564) 4710,2613 4725,2628 4836.31,2628 4847.31,2639 J8.2@4882,2639 ; C27.2@4050,4467.44 4094.26,4467.44 4113.71,4486.89 U50.32@4206.77,4486.89 4250.89,4486.89 4251.5,4487.5 4351.5,4487.5 4360,4479 4455,4479 4455,4534 4523,4534 4524,4533 ; T1.2@4050,5872 4343,5872 J1.11@4450,5765 ; U50.44@4206.77,4723.11 4262.89,4723.11 ; U50.20@4367.2,4306.77 4367.2,4259.8 4420,4207 4570.69,4207 ; v1(4520,4559) 4524,4555 4524,4533 ; v1(4520.5,4648.5) v1@4520.5,4652 ; R33.1@4540,5044 4540,5052 4517,5075 4384.41,5075 4383.69,5075.72 4341.43,5075.72 4310.71,5045 C26.2@4307.44,5045 4307.44,5021.56 4320,5009 4367.2,5009 U50.56@4367.2,4903.23 4367.2,4861.2 4284.63,4778.63 4284.63,4744.85 4262.89,4723.11 ; C22.2@4579.69,4230 C22.2@4580,4230 ; v1(4584,4830) 4590,4830 4603.43,4843.43 U50.68@4603.43,4903.23 U50.68@4604.2,4904.01 ; L4.1@4601.5,4110 4601.5,4184.5 4579,4207 4570.69,4207 ; U50.8@4603.43,4306.77 4603.43,4240 4593.43,4230 C22.2@4580,4230 ; v1(4623,3932) 4625,3930 4823,3930 v1(4843,3910) ; v1(4623,4053) L4.1@4623,4094 ; U50.81@4803.23,4742.8 4676.84,4742.8 4586.04,4652 v1@4520.5,4652 ; v1@4843,3911 4957,4025 v1(4957,4040) ; C25.2@4895,4519.69 C25.2@4895.69,4519 ; C25.2@4900,4519 C25.2@4895.69,4519 ; 4971,4361 5055,4445 4993.5,4506.5 4908.19,4506.5 C25.2@4895.69,4519 ; v1(5205.22,2579.5) 5207.72,2582 5225,2582 T6.2@5282,2639 ; T8.2@5358.36,5287.64 5358.36,5191.64 R8.2@5530,5020 ; 4262.89,4723.11 4290,4696 4290,4655 4515.5,4655 4516.5,4656 v1@4520.5,4652 ; 4524,4533 4563.57,4533 4573.57,4523 4736.46,4523 4752.1,4507.35 4802.45,4507.35 U50.93@4803.23,4506.57 4873.11,4506.57 4885.54,4519 4895,4519 C25.2@4895.69,4519 ; 4570.69,4207 4580,4216.31 C22.2@4580,4230
  other v1: 4973.5,4342.78
3.3V_LDO: J8.1 LDO.2 | length 1185.4
  Top Layer w10: J8.1@4882,2539 4880,2538 4912,2506 5089,2506 5132,2549 5217.85,2549 5235.72,2566.87 5235.72,2610 5225,2620.72 v1(5225,2763) ; v1@5348,2984 5377,3013 5377,3242 5378,3243 5423,3243 LDO.2@5425,3245
  Bottom Layer w10: v1(5225,2763) 5225,2784.96 5298,2857.96 5298,2934 v1(5346,2982)
3.3V_PS: J5.16 R42.1 | length 192.5
  Top Layer w10: R42.1@4890,2828.15 4892,2828.15 R42.1@4892,2833
  Top Layer w50: R42.1@4892,2833 v1(4892,2863)
  Bottom Layer w50: J5.16@4750,2830 4859,2830 v1(4892,2863)
5VUSB: L5.2 S1.3 U50.67 | length 5798.7
  Top Layer w10: v1(2714.5,2975.5) 2857,2833 2857,2787.34 3056.34,2588 L5.2@3537,2588 ; v1(3403,4475) 3404,4476 3639,4476 3776.5,4613.5 3776.5,4670.63 3762,4685.13 v1(3762,4801) ; 4275,2405 4275,2406
  Top Layer w20: L5.2@3560,2591 3613,2591 v1(3614,2590) ; v1(3980,2482) 4057,2405 4275,2405 4509,2405 ; 4511,2408 4548.43,2445.43 S1.3@4548.43,2498.46
  Bottom Layer w10: v1@2712.5,2975.5 v1(2714.5,2975.5) 2789.5,2975.5 2985,3171 2985,3395 3381,3791 3381,4453 v1(3403,4475) ; v1(3762,4801) 3777,4816 3777,4890.04 3936.96,5050 4074,5050 4134,5110 4580.48,5110 4587.31,5103.17 4587.31,4988.31 4583.74,4984.74 U50.67@4583.74,4903.23
  Bottom Layer w20: v1(3614,2590) 3615,2590 3670,2535 3927,2535 v1(3980,2482)
5VUSB_SW: J5.15 S1.2 | length 487.1
  Top Layer w50: S1.2@4450,2499 4450,2578 4482,2610 4607,2610 4650,2653 J5.15@4650,2830
CHRGEN: J5.12 U50.90 | length 2977
  Top Layer w8: v1@4909,4579 4909,4475 5058,4326 5058,3457.37 5096,3419.37 5096,3182.75 5178,3100.75 5178,2747 v1(5143,2712)
  Bottom Layer w8: J5.12@4350,2830 4483,2697 4780.12,2697 4819.12,2736 4934.37,2736 4958.37,2712 v1(5143,2712) ; U50.90@4803.23,4565.63 4895.63,4565.63 v1@4908,4578
  other v1: 4912,4579
GND: ANT1.2 ANT1.3 ANT1.4 ANT1.5 C1.1 C2.1 C3.1 C4.1 C6.1 C7.1 C8.1 C9.1 C10.1 C11.1 C12.1 C13.1 C14.1 C15.1 C16.1 C17.1 C18.1 C19.2 C20.1 C21.1 C22.1 C23.1 C24.1 C25.1 C26.1 C27.1 C28.1 C29.1 C30.1 C33.1 IR1.2 IR2.2 IR3.2 IR4.2 IR5.2 IR6.2 IR7.2 IR8.2 J1.10 J2.7 J3.9 J4.3 J4.5 J4.9 J5.3 J6.2 J7.5 J7.6 J7.7 J7.8 J7.9 LDO.3 LDO.6 Q1.2 Q2.2 R2.1 R6.2 R9.2 R25.1 R28.2 R30.2 R34.2 R35.1 R36.1 R40.1 R41.1 SW1.2 SW2.2 SW3.2 SW4.2 U1.8 U1.14 U1.17 U1.20 U2.5 U2.10 U2.15 U2.20 U2.23 U2.29 U2.30 U2.33 U50.4 U50.9 U50.21 U50.33 U50.45 U50.57 U50.69 U50.82 U50.94 XTAL1.2 XTAL1.4 | length 28700.1
  Top Layer w10: C17.1@2297.53,3331.81 C17.1@2300,3331.81 ; C17.1@2300,3332 C17.1@2300,3331.81 ; C11.1@2325,4729 2388,4666 IR2.2@2389,4667 2423,4701 2473,4701 2516,4744 2516,5030 2560,5074 2616.53,5074 2641,5049.53 R6.2@2645,5049.53 2700.47,5105 v1(2709,5105) ; v1(2619,4651) 2619,4478 2443,4302 2443,3387 IR3.2@2389,3333 2343.19,3333 2342,3331.81 C17.1@2300,3331.81 ; 2700,4115.32 2710.32,4105 C2.1@2710.32,4077 2710.32,3941.68 ANT1.3@2760,3892 2851,3892 2895,3936 C4.1@2895,3987.32 C3.1@2935,3987.32 ; XTAL1.2@2700,4143.89 2672,4143.89 2664,4151.89 2664,4356 2688,4380 2744,4380 2754.69,4369.31 ; XTAL1.4@2762.99,4262 2762.99,4305 2754.69,4313.31 2754.69,4336 ; J3.9@2780,4722 2733,4675 2733,4499.69 2754.69,4478 2754.69,4369.31 ; v1(2904,5408) 2904,5488 3082,5666 3277,5666 IR1.2@3319,5624 ; U1.8@2917.24,4232 2887,4232 2825.32,4293.68 C8.1@2825.32,4317 2773.69,4317 2754.69,4336 ; v1(2949,2961) 2792,3118 2485,3118 2300,3303 C17.1@2300,3331.81 ; 3014.46,4136.46 3064.69,4086.23 v1(3064.69,3948) C6.1@3064.69,3907 ; v1@3065,3948 3184.53,4067.53 R2.1@3184.53,4132 ; U1.17@3072.76,4212.32 3120,4212.32 3164.37,4256.69 C9.1@3175,4256.69 3175,4291 v1(3191,4307) ; U1.20@3072.76,4271.37 3087,4271.37 3087,4316.69 3102,4331.69 C7.1@3125,4331.69 v1(3125,4375) ; v1(3073,3031) 3082,3031 3166,2947 3333,2947 J5.3@3450,2830 ; C23.1@3268.19,2332.47 3268.19,2344 3288,2344 IR4.2@3333,2389 ; C10.1@3328,5694 3328,5771 v1(3365,5808) ; C10.1@3331.81,5692.47 3331.81,5652.19 3333,5651 IR1.2@3333,5611 ; SW2.2@3340,3330 3386,3330 3404,3312 v1(3404,3281) ; C15.1@3515.32,2475 3515.32,2432.58 3543.89,2404 J7.6@3543.89,2362.17 3543.89,2318.11 ; J7.7@3522.3,2250.06 3522.3,2295 3543.89,2318.11 ; Q1.2@3605.6,4115.43 3605.6,4192 3638.13,4224.53 R35.1@3730,4224.53 ; R35.1@3729,4229 v1(3729,4285) ; v1(3729,4371) v1(3908,4550) ; J7.5@3743.85,2300.15 3743.85,2240.85 3698,2195 3667,2195 3543.89,2318.11 ; J7.5@3746.86,2323.09 3762.12,2307.83 J7.9@3826.11,2307.83 3826.11,2261.59 3804.52,2240 J7.8@3804.52,2195.71 ; C14.1@3802.56,3295 3840,3295 v1(3848,3287) ; U2.23@3902.56,3102.09 U2.33@3951.91,3102.09 ; U2.20@3902.56,3161.14 U2.33@3952.76,3161.14 ; U2.33@3950.79,3205.79 U2.15@3950.79,3248.74 ; R25.1@3960,2920.47 C20.1@4009.53,2920.47 ; U2.33@4009.84,3099.84 U2.29@4009.84,3053.86 4009.84,3032.16 4033,3009 4033,2939.32 4024,2930.32 C20.1@4010,2930.32 ; U2.30@4029.53,3053.86 U2.33@4029.53,3099.53 ; v1(4047.24,3198.54) 4051.14,3194.65 4051.14,3161.14 U2.5@4097.44,3161.14 ; U2.33@4049.21,3199.21 U2.10@4049.21,3248.74 ; v1(4054,4844) 4150,4940 4150,5028 ; v1@4057.44,2922.44 4060,2925 v1(4065,2925) ; v1(4092,3682) SW3.2@4092,3725 ; v1(4107,2925) 4107,2808 4179.53,2735.47 R28.2@4179.53,2645 ; J2.7@4150,5170 4150,5028 ; v1(4177,2517) R28.2@4177,2640 ; C21.1@4182,3295 C21.1@4182.44,3295 4200,3295 4208,3287 v1(4208,3252) ; J1.10@4350,5765 4393,5808 4567.81,5808 4700.81,5675 C12.1@4730.32,5675 4730.32,5632 4709.32,5611 IR8.2@4667,5611 ; v1(4360,3412) v1@4360,3679 ; v1(4384,4792) 4385,4793 4150,5028 ; v1(4624,4971) 4624,5024.47 R41.1@4650,5050.47 R40.1@4750,5050.47 ; 4667,2353 IR5.2@4667,2389 ; C24.1@4667.19,2317.53 4667.19,2352 ; v1(4693.58,4712.3) 4700.3,4712.3 4758,4770 R30.2@4758,4989 ; R30.2@4754.53,5005 4754.53,5048.53 R40.1@4755,5049 ; SW4.2@4840,3330 v1(4840,3384) ; v1(4909,4636) 4907,4634 4909,4634 4945,4634 4947,4632 ; R36.1@4970,4880 4970,5041 v1(4970.5,5041.5) ; R36.1@4970.47,4870 4970.47,4839.47 4949,4818 4949,4477 v1(4977,4449) ; v1(5094,3065) 5120,3065 5128.15,3056.85 C19.2@5128.15,3010 ; Q2.2@5123,4900 5123,4851 5160,4814 R34.2@5160,4769.53 ; Q2.2@5124.57,4902.6 5253.07,4902.6 5310.47,4960 R9.2@5310.47,5020 5292.47,5038 5267.72,5038 v1(5264.22,5041.5) ; v1@5213,3155 5212,3156 5175,3193 LDO.6@5175,3295 ; 5224.61,4020.39 5225,4020.39 ; 5225,4020 5225,4020.39 ; 5226,4021 5226,4020.39 ; J4.9@5263,3869 5251,3869 5225,3895 5225,3970 ; J4.9@5308.89,3869.21 5308.89,3488 5300.89,3480 SW1.2@5245,3480 5199,3480 5175,3456 LDO.6@5175,3295 ; J4.5@5308.89,3970 5225,3970 ; J4.3@5308.89,4020.39 5226,4020.39 ; LDO.3@5425,3295 5391,3295 ; v1(5451,4777) 5451,4630 5394,4573 5394,4450 5225,4281 5225,4020.39 ; IR7.2@5611,4667 5643.69,4699.69 C13.1@5720,4699.69 ; 5666,3278 IR6.2@5611,3333 5520,3424 5398,3424 5382,3408 5382,3304 5391,3295 ; 2754.69,4336 C1.1@2754.69,4357 2754.69,4369.31 ; LDO.6@5175,3295 5391,3295 ; 5225,3970 5225,4019.39 5226,4020.39 ; 5225,4020.39 5226,4020.39
  Top Layer w20: v1(3184,3755) 3272,3755 ; v1(3293,4097) Q1.2@3599,4097 ; v1(3295,3878) 3272,3855 3272,3755 ; v1(3630,3469) 3344,3755 3272,3755
  Bottom Layer w10: IR2.2@2404,4660 2610,4660 v1(2619,4651) ; v1(2709,5105) 2838,5234 2838,5342 v1(2904,5408) ; ANT1.3@2760,3892 2816,3948 v1(3064.69,3948) v1@3065,3948 ; v1(2949,2961) 3003,2961 v1(3073,3031) ; v1@3125,4371 v1(3125,4375) ; v1@3191,4305 v1(3191,4307) ; IR4.2@3333,2389 3369,2389 3389,2409 3461.17,2409 3508,2362.17 J7.6@3543.89,2362.17 ; v1(3365,5808) 4307,5808 J1.10@4350,5765 ; v1(3404,3281) 3504,3281 3520,3265 3520,3209 3512,3201 3512,3136 3598,3050 3545,2997 3545,2925 J5.3@3450,2830 ; v1(3715,3100) 3848,3233 v1(3848,3287) ; v1(3729,4285) v1(3729,4371) ; J7.9@3834,2323 3931,2323 4124,2516 v1@4173,2516 ; v1@3909,4558.44 3909,4769 3969.69,4829.69 3991,4829.69 4039.69,4829.69 v1(4054,4844) ; v1@3920,4547.44 3923.56,4551 3951.56,4523 4050,4523 C27.1@4050,4522.56 4091.44,4522.56 4089,4525 4089,4662.96 4146.18,4720.14 4146.18,4736.14 4152.06,4742.02 4205.99,4742.02 U50.45@4206.77,4742.8 ; v1@3952,3103 3952.76,3103.76 v1(3952.76,3104.06) v1(3952.76,3151.3) v1(3952.76,3198.54) 4006.21,3252 4188,3252 ; C29.1@3991,4831.69 C30.1@3991,4865 ; v1@3999,3102 4000,3103 v1(4000,3104.06) v1(4000,3151.3) v1(4000,3198.54) ; v1(4047.24,3104.06) 4047.24,3102.76 v1@4050,3100 ; v1(4047.24,3198.54) v1(4047.24,3151.3) 4047.24,3107.76 v1@4050,3105 ; v1(4092,3682) 4093,3681 4357,3681 4357,3682 4359,3680 v1(4360,3680) ; 4093,4522.56 4122.44,4522.56 4137,4508 ; v1(4107,2925) v1(4065,2925) 4065,3104.06 4065,3129 4188,3252 ; 4125,4522 4135,4532 C33.1@4135,4560.31 ; 4135.99,4506.57 U50.33@4206.77,4506.57 ; v1(4177,2517) 4178,2518 4538,2518 IR5.2@4664,2392 ; v1(4208,3252) 4188,3252 ; v1@4345,3409 4198,3262 4188,3252 ; U50.21@4347.52,4306.77 4347.52,4250.48 4409,4189 4479.69,4189 C28.1@4479.69,4165 ; U50.21@4347.52,4306.77 4347.5,4431.5 4359,4443 4535.06,4443 4561.61,4469.56 4632,4469.56 4642.56,4459 4642.56,4442.56 4635,4435 ; C26.1@4362.56,5045 4362.56,5039.1 4386.11,5015.55 U50.57@4386.11,4926.56 ; v1(4384,4792) v1@4386.89,4794.89 ; U50.57@4386.89,4903.23 v1@4386.89,4794.89 ; C22.1@4540.32,4230 4540.32,4240 4553.32,4253 4583.74,4253 U50.9@4583.74,4306.77 4583.74,4383.74 4635,4435 ; U50.69@4623.11,4903.23 4623.11,4825.98 4569.36,4772.23 4555.88,4772.23 4555.11,4773 4485.89,4773 4485.12,4772.23 4409.55,4772.23 v1@4386.89,4794.89 ; U50.69@4623.89,4925 4623.89,4970.89 v1(4624,4971) ; 4632,4470 4667,4505 4729,4505 4746.33,4487.67 4802.45,4487.67 U50.94@4803.23,4486.89 4872.11,4486.89 4880,4479 4895,4479 4915,4479 4943,4451 4943,4449 ; U50.4@4682.17,4306.77 4682.17,4362.12 4694,4373.96 4694,4410.24 4685.5,4418.74 4685.5,4419.83 4673.33,4432 4638,4432 4635,4435 ; v1(4693.58,4712.3) 4693.87,4712 4694,4712 4704.33,4723.33 U50.82@4778.33,4723.33 ; U50.82@4803.23,4723.11 4879.33,4723.11 4879.44,4723 4903.7,4723 5182,4444.7 5182,4354 5126.5,4298.5 4954.5,4298.5 4949.5,4303.5 4949.5,4309.63 4943,4316.13 4943,4449 ; v1(4840,3384) 4991.5,3232.5 5080.5,3232.5 5094,3219 v1(5094,3065) ; C16.1@4875,4649.69 4887.31,4649.69 4901,4636 v1(4909,4636) ; v1(4970.5,5041.5) v1(5264.22,5041.5) ; v1(4977,4449) 4943,4449 ; v1(5213,3157) 5215,3155 5215,3088 ; v1@5452.74,4778.74 5564.47,4667 IR7.2@5611,4667 IR7.2@5616,4672 ; J6.2@5536.66,3072.12 5617,3152.45 5617,3327 IR6.2@5611,3333
  Bottom Layer w20: 3044,3755 v1(3184,3755) ; v1(3293,4097) 3295,4095 v1(3295,3878) ; v1(3630,3469) 3775,3324
GYRO_ST: J2.9
GYRO_VREF: J2.8
GYROA_X_4: J2.11